# Altium PCB ECE315.PcbDoc
Units mil, origin at the board's own origin, x right, y up, seen from the top; angles counter-clockwise.
Board outline 1968.5 x 1968.5 mil, 2 copper layers (Top Layer, Bottom Layer); 21 components, 23 nets, 126 pads, 30 vias.
Unrouted connection lines stored in the file: 41.
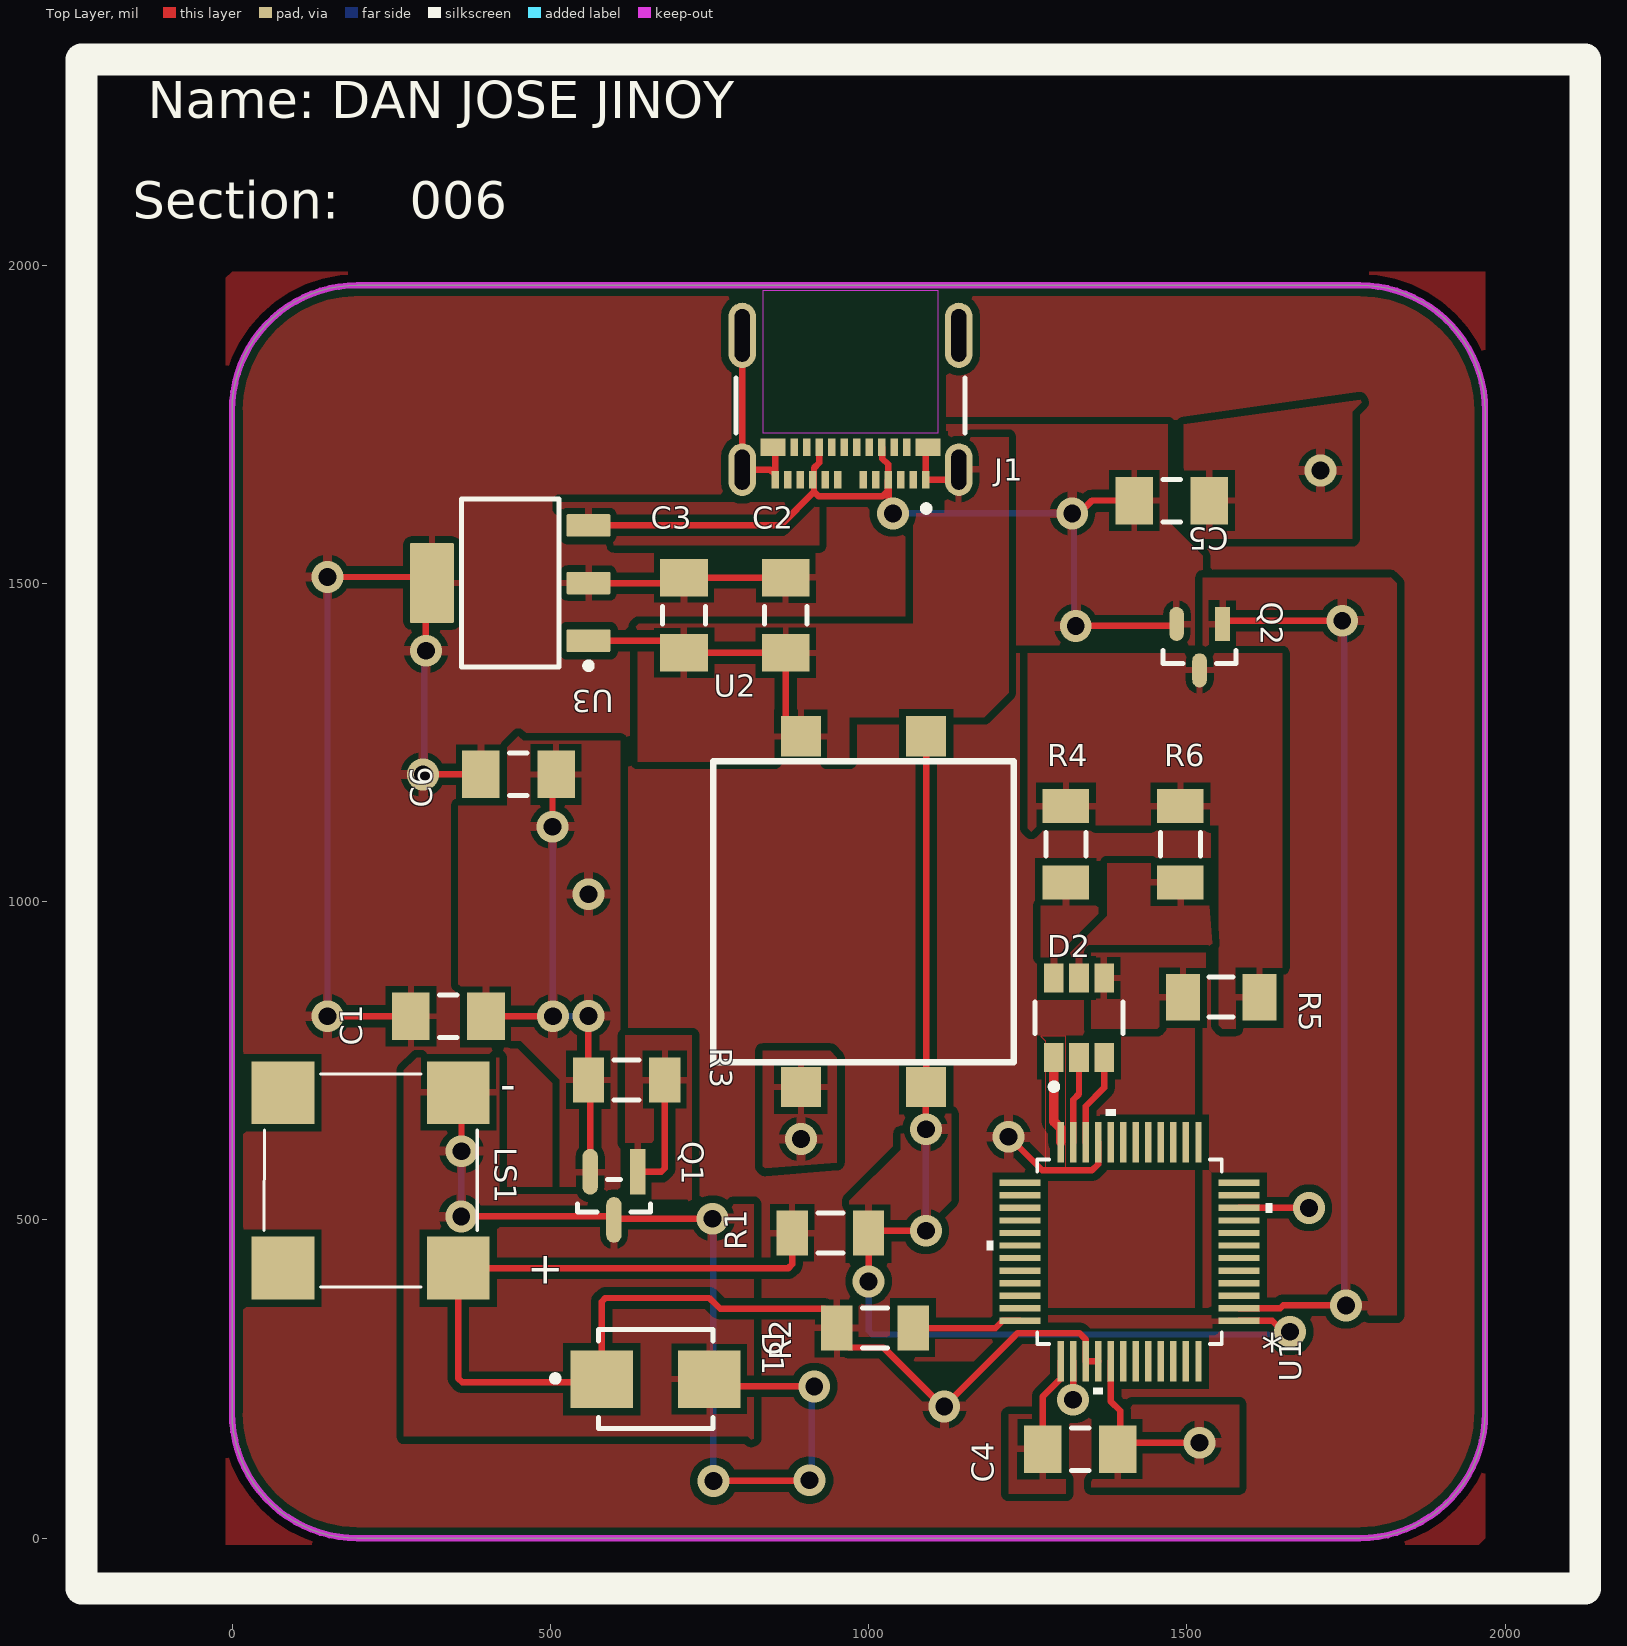
[diagram p0: Top Layer view]
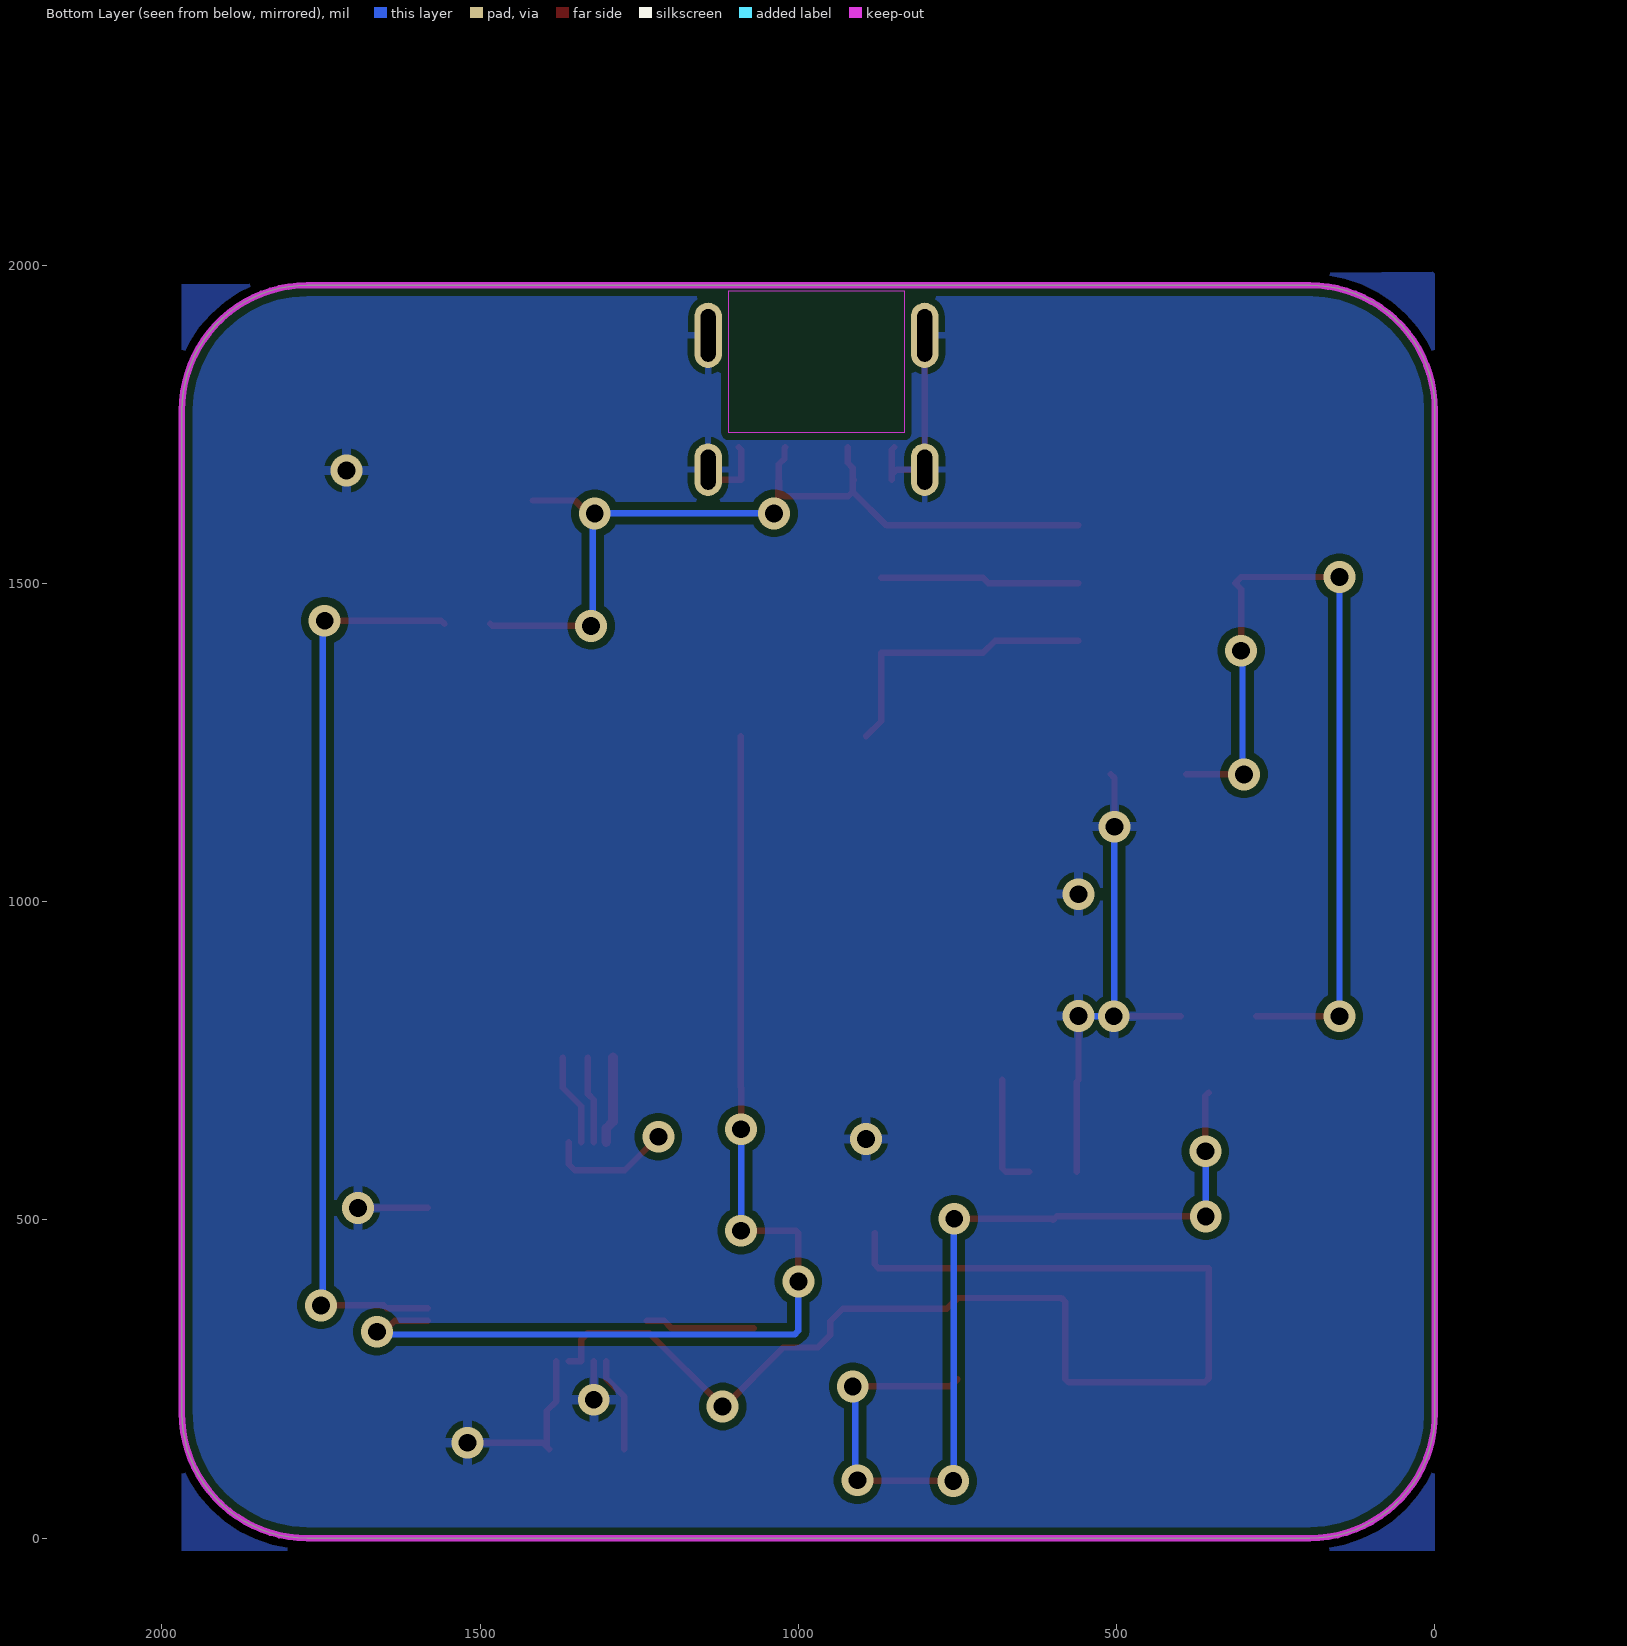
[diagram p1: Bottom Layer view, seen from below]
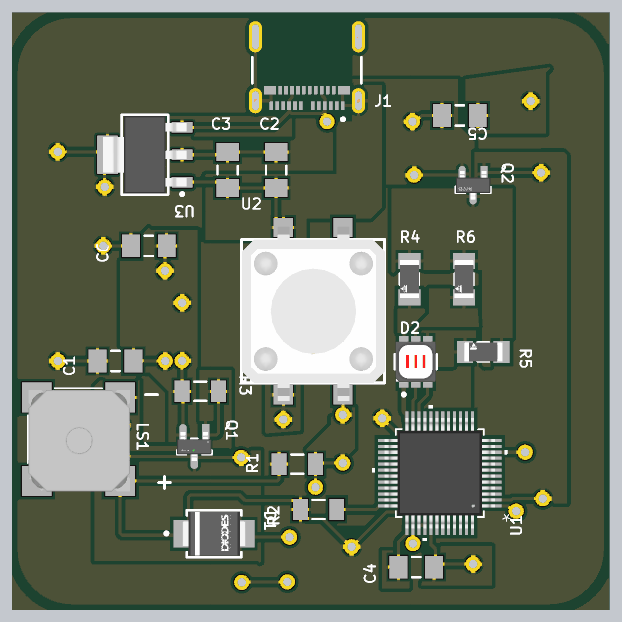
[diagram p2: 3D render of the assembled board from above, using the file's embedded part models]

## Layer stack, top to bottom
Top Solder: solder mask 0.4, Solder Resist, Dk 3.5
Top Layer: signal copper 1.4
Dielectric1: dielectric 12.6, FR-4, Dk 4.8
Bottom Layer: signal copper 1.4
Bottom Solder: solder mask 0.4, Solder Resist, Dk 3.5

## Board outline
0,196.85 ccw(c196.85,196.85) 196.85,0 1771.65,0 ccw(c1771.65,196.85) 1968.5,196.85 1968.5,1771.65 ccw(c1771.65,1771.65) 1771.65,1968.5 196.85,1968.5 ccw(c196.85,1771.65) 0,1771.65

## Design rules (kind name [scope] priority, off if disabled: settings)
Clearance Polygon_Clearance [All vs InPolygon] p1: gap=12 ignorepadtopadclearanceinfootprint=FALSE except(0: Arc-Hole Track-Hole SMDPad-Hole THPad-Hole Via-Hole Fill-Hole Poly-Hole Region-Hole Text-Hole)
Clearance [All] p2: gap=7 ignorepadtopadclearanceinfootprint=TRUE
ComponentClearance [InComponent('U3')] p1: gap=0 collisioncheckmode=3 verticalgap=10 showdistances=FALSE
Height [All] p1: minheight=0 maxheight=866.14 prefheight=500
HoleSize [All] p1: absolutevalues=TRUE maxlimit=250 minlimit=0 maxpercent=80.000 minpercent=20.000
MinimumAnnularRing [All] p1: minimumring=6
MinimumSolderMaskSliver [All] p1: minsoldermaskwidth=0
NetAntennae NetAntennae_5.0V [InNet('5.0V')] p1: netantennaetolerance=0
NetAntennae NetAntennae_3.3V [InNet('3.3V')] p2: netantennaetolerance=0
PolygonConnect [IsNamedPolygon('5.0V_L01_P019') or IsNamedPolygon('3.3V_L01_P020') vs IsVia] p1: connectstyle=Relief reliefconductorwidth=10 reliefentries=4 polygonreliefangle="90 Angle" airgapwidth=10
PolygonConnect PolygonConnect_2 [All vs IsVia] p2: connectstyle=Relief reliefconductorwidth=15 reliefentries=4 polygonreliefangle="90 Angle" airgapwidth=10
PolygonConnect PolygonConnect_1 [All] p3: connectstyle=Relief reliefconductorwidth=10 reliefentries=4 polygonreliefangle="90 Angle" airgapwidth=10
RoutingVias [All] p1: holewidth=28 width=50 viastyle="Through Hole" minholewidth=15 minwidth=25 maxholewidth=28 maxwidth=50
SilkToSilkClearance [All] p1: silktosilkclearance=0
SilkToSolderMaskClearance [IsPad] p1: minsilkscreentomaskgap=0 clearancetoexposedcopper=TRUE
SolderMaskExpansion [All] p1: expansion=4 istentingtop=FALSE
Width [All] p1: maxlimit=150 minlimit=7 preferedwidth=15
23 further rules are at their usual default settings.

## Components (designator, comment, footprint, x,y, rotation, side; value= is the part's Value field where it differs from the comment)
C1 "C1206C105K3RACTU" CAPC3216X180X50ML20T25 340,820 r180 top
C2 "C1206C105K3RACTU" CAPC3216X180X50ML20T25 870,1450 r90 top
C3 "C1206C105K3RACTU" CAPC3216X180X50ML20T25 710,1450 r90 top
C4 "C1206C105K3RACTU" CAPC3216X180X50ML20T25 1332.52,140 r180 top
C5 "C1206C105K3RACTU" CAPC3216X180X50ML20T25 1476.38,1630.18 r180 top
C6 "C1206C105K3RACTU" CAPC3216X180X50ML20T25 450,1200 r180 top
D1 "B340LB-13-F" FP-SMB-MFG 665.35,250 r0 top value=180pF
D2 "CLX6F-FKC-CKNNQDGBB7A363" FP-CLX6F-FKC-CKNNQDGBB7A3-IPC_C 1330.63,817.6 r90 top
J1 "1054500101" FP-1054500101-MFG 971.65,1811.02 r180 top locked
LS1 "CMT-8540S-SMT" CUI_CMT-8540S-SMT 217.8,562.2 r0 top
Q1 "2N7002ET1G" FP-318-08-IPC_A 600,537.8 r270 top
Q2 "DMP3099L-7" FP-SOT23-IPC_B 1520,1400 r270 top
R1 "RC1206FR-0710KL" RESC3116X65X40ML10T20 940,479.53 r180 top
R2 "RC1206FR-0710KL" RESC3116X65X40ML10T20 1010.04,330 r180 top
R3 "RC1206FR-0710KL" RESC3116X65X40ML10T20 619.96,720 r0 top
R4 "CRCW1206330RFKEA" FP-CRCW1206-e3-IPC_A 1310,1090.08 r270 top
R5 "CRCW1206330RFKEA" FP-CRCW1206-e3-IPC_A 1553.73,850 r180 top
R6 "CRCW1206330RFKEA" FP-CRCW1206-e3-IPC_A 1490,1090.08 r270 top
U1 "CY8C4045AZI-S413" TQFP48_7X7X1P4_CYP-M 1410,450 r180 top
U2 "TL3300DF160Q" TL3300DF160Q 992.13,984.25 r90 top locked
U3 "TLV1117LV33DCYR" DCY0004A_N 436.97,1500.55 r180 top

## Footprints (in the part's own frame and the unit in brackets; to place one, negate y for a bottom-side part, rotate by r counter-clockwise, add the part's x,y. Pads: shape width x height; smd on the part's side, far side on the other; paste and mask are expansions set on the pad)
CAPC3216X180X50ML20T25 [mm] "Chip Capacitor, 2-Leads, Body 3.40x1.80mm, IPC Low Density"
  rect 1.5x1.9 smd: 1(-1.5,0) 2(1.5,0)
  silkscreen extent -0.35,-0.85 0.35,0.85, body extent -1.7,-0.9 1.7,0.9, height 1.8
CUI_CMT-8540S-SMT [mm]
  rect 2.5x2.5 smd: 1(-3.5,3.5) 2(-3.5,-3.5) N(3.5,3.5) P(3.5,-3.5)
  silkscreen extent -4.25,-4.25 4.25,4.25, body extent -4.18,-4.38 4.32,4.12, height 4.05
DCY0004A_N [mm] "SOT223, 4-Leads, Body 6.7x3.7mm, Pitch 2.3mm, IPC Medium Density"
  rrect11% 1.75x0.9 smd: 1(-3.125,2.3) 2(-3.125,0) 3(-3.125,-2.3)
  rrect6% 1.75x3.2 smd: 4(3.125,0)
  silkscreen extent -3.25,-3.35 1.95,3.42, body extent -3.5,-3.25 3.5,3.25, height 1.62
FP-318-08-IPC_A [mm]
  rect 1.824x0.618 smd paste+0 mask+0: 1(-0.96,0.95)
  rrect100% 1.824x0.618 smd paste+0 mask+0: 2(-0.96,-0.95) 3(0.96,0)
  silkscreen extent -0.65,-1.45 0.65,1.45, body extent -2.37,-1.95 2.37,1.95, height 0.25
FP-1054500101-MFG [mm]
  rrect100% 1.1x2.1 hole 1.6 slot 0.6 at 0 deg paste-1000 mask+0: 1(-4.32,3.36) 2(4.32,3.36)
  rrect100% 1.1x2.6 hole 2.1 slot 0.6 at 0 deg paste-1000 mask+0: 3(-4.32,-2) 4(4.32,-2)
  rect 0.3x0.7 smd paste+0 mask+0: A1(-3,3.77) A2(-2.5,3.77) A3(-2,3.77) A4(-1.5,3.77) A5(-1,3.77) A6(-0.5,3.77) A7(0.5,3.77) A8(1,3.77) A9(1.5,3.77) A10(2,3.77) A11(2.5,3.77) A12(3,3.77) B2(2.25,2.47) B3(1.75,2.47) B4(1.25,2.47) B5(0.75,2.47) B6(0.25,2.47) B7(-0.25,2.47) B8(-0.75,2.47) B9(-1.25,2.47) B10(-1.75,2.47) B11(-2.25,2.47)
  rect 1x0.7 smd paste+0 mask+0: B1(3.1,2.47) B12(-3.1,2.47)
  Keep-Out Layer region: -3.5,-3.77 3.5,-3.77 3.5,1.88 -3.5,1.88
  silkscreen extent -4.57,-0.3 4.57,5.03
FP-CLX6F-FKC-CKNNQDGBB7A3-IPC_C [mm]
  rect 1.16x0.78 smd paste+0 mask+0: 1(-1.585,1) 2(-1.585,0) 3(-1.585,-1) 4(1.585,-1) 5(1.585,0) 6(1.585,1)
  silkscreen extent -2.87,-1.75 0.63,1.75, body extent -2.26,-1.85 2.26,1.85, height 0.25
FP-CRCW1206-e3-IPC_A [mil]
  rect 53.39x73.16 smd paste+0 mask+0: 1(-60.08,0) 2(60.08,0)
  silkscreen extent -19,-31 19,31, body extent -106,-56 106,56, height 10
FP-SMB-MFG [mm]
  rect 2.5x2.3 smd paste+0 mask+0: 1(-2.15,0) 2(2.15,0)
  silkscreen extent -4.12,-1.97 2.28,1.97, body extent -3.5,-2.07 3.5,2.07, height 0.25
FP-SOT23-IPC_B [mm]
  rect 1.359x0.587 smd paste+0 mask+0: 1(-0.927,0.915)
  rrect100% 1.359x0.587 smd paste+0 mask+0: 2(-0.927,-0.915) 3(0.927,0)
  silkscreen extent 0.13,-1.45 0.65,1.45, body extent -1.86,-1.7 1.86,1.7, height 0.25
RESC3116X65X40ML10T20 [mm] "Chip Resistor, 2-Leads, Body 3.10x1.60mm, IPC Low Density"
  rect 1.25x1.8 smd: 1(-1.525,0) 2(1.525,0)
  silkscreen extent -0.5,-0.8 0.5,0.8, body extent -1.6,-0.85 1.6,0.85, height 0.65
TL3300DF160Q [mm] "SWITCH TACTILE SPST-NO 0.05A 12V"
  rect 1.6x1.6 smd: 1(-7,2.5) 2(7,2.5) 3(-7,-2.5) 4(7,-2.5)
  silkscreen extent -6,-6 6,6, body extent -7.51,-6.03 7.49,5.97, height 4.3
TQFP48_7X7X1P4_CYP-M [mil]
  rect 64x10 smd paste+0 mask+0: 1(-172,108.27) 2(-172,88.58) 3(-172,68.9) 4(-172,49.21) 5(-172,29.53) 6(-172,9.84) 7(-172,-9.84) 8(-172,-29.53) 9(-172,-49.21) 10(-172,-68.9) 11(-172,-88.58) 12(-172,-108.27) 25(172,-108.27) 26(172,-88.58) 27(172,-68.9) 28(172,-49.21) 29(172,-29.53) 30(172,-9.84) 31(172,9.84) 32(172,29.53) 33(172,49.21) 34(172,68.9) 35(172,88.58) 36(172,108.27)
  rect 10x64 smd paste+0 mask+0: 13(-108.27,-172) 14(-88.58,-172) 15(-68.9,-172) 16(-49.21,-172) 17(-29.53,-172) 18(-9.84,-172) 19(9.84,-172) 20(29.53,-172) 21(49.21,-172) 22(68.9,-172) 23(88.58,-172) 24(108.27,-172) 37(108.27,172) 38(88.58,172) 39(68.9,172) 40(49.21,172) 41(29.53,172) 42(9.84,172) 43(-9.84,172) 44(-29.53,172) 45(-49.21,172) 46(-68.9,172) 47(-88.58,172) 48(-108.27,172)
  silkscreen extent -224,-224 224,224, body extent -182,-182 182,182, height 63

## Part data
C1 C2 C3 C4 C5 C6: library part CMP-2000-04991-1, "Chip Capacitor, 1 uF, +/- 10%, 25 V, -55 to 125 degC, 1206 (3216 Metric), RoHS, Tape and Reel", Capacitance=1uF, Capacitance - nF=1000nF, Case Code (Imperial)=1206, Case Code (Metric)=3216, Case Height=1.6mm, Case Length=3.2mm, Dielectric=X7R, Manufacturer=Kemet, Max Operating Temperature=125°C, Maximum Operating Temperature=+125C, Min Operating Temperature=-55°C, Minimum Operating Temperature=-55C, Operating Temperature Range=-55Cto+125C, Package / Case=1206(3216metric), Package Description="2-Pin Surface Mount Device, Body 3.2 x 1.6 mm", Package Quantity=1, Supplier Part Number 1=399-C1206C105K3RAC7800CT-ND, Temperature Coefficient / Code=+/-15%, Tolerance=10%, Voltage=25V, Brand=Kemet, Case Code - in=1206, Case Code - mm=3216, Case Width=1.6mm, Case/Package=1206, Category="Ceramic Capacitors", Class=Class1, Construction=Flat, Datasheet URL=https://ciiva.com/datasheet-click-18194173?src=ciiva&sig=6daff8c4, Datasheet Version=Jul-14, Depth=1.6mm, Dimensions=1.6mmWx3.2mmLx1.6mmH, Factory Pack Quantity=2000, Height=1.6mm, Length=3.2mm, Manufacturer Part Number=C1206C105K3RACTU, Manufacturer URL=http://www.kemet.com/, Mount="Surface Mount", Package Reference=1206, Packaging=Reel, Pricing 1="1=0.24000, 10=0.16700, 50=0.10000, 100=0.08440, 500=0.05778, 1000=0.05111 (USD)", Product=GeneralTypeMLCCs, Product Category=MultilayerCeramicCapacitorsMLCC-SMD/SMT, Radiation Hardening=No, Reach SVHC Compliant=No, RoHS=Details, RoHS Compliant=Yes, Series=C1206C, Stock 1=908349, Supplier 1=Digi-Key, Termination=SMD/SMT, Termination Style=SMD/SMT, Thickness=0.055inch, Type=SMDMLCCX7R6.3-250VDCCommericalGrade, Voltage Rating=25V, Voltage Rating (DC)=25V, Voltage Rating DC=25V, Width=0.063inch
D1: library part CMP-12790-000022-1, "DIODE SCHOTTKY 40V 3A SMB", Average Rectified Current=3A, Capacitance=180pF, Case/Package=SMB, Forward Voltage=450mV, Manufacturer="Diodes Inc.", Max Forward Surge Current (Ifsm)=70A, Max Junction Temp=+150°C, Max Operating Temperature=125°C, Max Repetitive Reverse Voltage=40V, Max Reverse Current=2mA, Min Operating Temperature=-55°C, Package Quantity=3000, Supplier Part Number 1=B340LB-FDICT-ND, Temperature="-55°C to +150°C", Automotive=No, Category=Diode, ComponentLink1Description=https://datasheet.ciiva.com/4715/ds30240-71143-4715794.pdf?src-supplier=Mouser, ComponentLink1URL=https://datasheet.ciiva.com/4715/ds30240-71143-4715794.pdf?src-supplier=Mouser, ComponentLink2Description=Datasheet, ComponentLink2URL=https://www.diodes.com/assets/Datasheets/ds30240.pdf, ComponentLink3Description=https://datasheet.ciiva.com/26949/getdatasheetpartid-146318-26949355.pdf?src-supplier=Verical, ComponentLink3URL=https://datasheet.ciiva.com/26949/getdatasheetpartid-146318-26949355.pdf?src-supplier=Verical, ComponentLink4Description=https://datasheet.ciiva.com/1177/ds30240-1177479.pdf?src-supplier=Element14, ComponentLink4URL=https://datasheet.ciiva.com/1177/ds30240-1177479.pdf?src-supplier=Element14, ComponentLink5Description=https://datasheet.ciiva.com/16380/ds30240-16380877.pdf?src-supplier=Future+Electronics, ComponentLink5URL=https://datasheet.ciiva.com/16380/ds30240-16380877.pdf?src-supplier=Future+Electronics, ComponentLink6Description=https://datasheet.ciiva.com/8303/ds30240-8303077.pdf?src-supplier=Avnet, ComponentLink6URL=https://datasheet.ciiva.com/8303/ds30240-8303077.pdf?src-supplier=Avnet, ComponentLink7Description=https://datasheet.ciiva.com/914/ds30240-914107.pdf?src-supplier=Digi-Key, ComponentLink7URL=https://datasheet.ciiva.com/914/ds30240-914107.pdf?src-supplier=Digi-Key, ComponentLink8Description=https://datasheet.ciiva.com/914/ds30240-914108.pdf?src-supplier=Digi-Key, ComponentLink8URL=https://datasheet.ciiva.com/914/ds30240-914108.pdf?src-supplier=Digi-Key, ComponentLink9Description=https://datasheet.ciiva.com/914/ds30240-914106.pdf?src-supplier=Digi-Key, ComponentLink9URL=https://datasheet.ciiva.com/914/ds30240-914106.pdf?src-supplier=Digi-Key, Current=3A, Current Rating=3A, Device Class L1="Discrete Semiconductors", Device Class L2=Diodes, Device Class L3="Schottky Diodes", Digikey Description="DIODE SCHOTTKY 40V 3A SMB", Element Configuration=Single, Footprint Url=https://www.diodes.com/assets/Package-Files/SMB.pdf, Forward Current=3A, Height=2.5mm, Lead Free=Yes, Length=4.57mm, Manufacturer Part Number=B340LB-13-F, Max Repetitive Reverse Voltage (Vrrm)=40V, Max Reverse Voltage (DC)=40V, Max Surge Forward Current=70A, Mount="Surface Mount", Mouser Description="Schottky Diodes & Rectifiers 40V 3A", Number of Pins=2, Octopart=https://octopart.com/b340lb-13-f-diodes+inc.-325823, Output Current=3A, Package=SMB, Packaging="Tape and Reel", Peak Non-Repetitive Surge Current=70A, Peak Reverse Current=2mA, Polarity=Standard, Pricing 1="1=0.43000, 10=0.36500, 100=0.27250, 500=0.21414, 1000=0.16547 (USD)", Radiation Hardening=No, Reach SVHC Compliant=Yes, Reverse Voltage=40V, RoHS=TRUE, RoHS Compliant=Yes, Series=-, Standoff Height=0.05mm, Stock 1=168517, Supplier 1=Digi-Key, Supplier 2=Newark, Supplier Part Number 2=12T1468, Temperature Range High=+150°C, Temperature Range Low=-55°C, Termination=SMD/SMT, Voltage=40V, Voltage Rating (DC)=40V, Weight=0.00328oz, Width=3.94mm
D2: library part CMP-240906-000003-1, "LED RGB 6PLCC SMD", Case Code (Imperial)=1206, Case Code (Metric)=3216, Case/Package=SMD/SMT, Color=Blue, Forward Voltage=3V, Manufacturer 1=Cree, Max Operating Temperature=155°C, Max Power Dissipation=400mW, Min Operating Temperature=-55°C, Resistance=49.9R, Resistor Type="Thin Film", Supplier Part Number 1=CLX6F-FKC-CKNNQDGBB7A363CT-ND, Temperature Coefficient=25ppm/°C, Test Current=10mA, Tolerance=0.1%, Category=Uncategorized, ComponentLink1Description=http://www.farnell.com/datasheets/2813756.pdf?src-supplier=Farnell, ComponentLink1URL=http://www.farnell.com/datasheets/2813756.pdf?src-supplier=Farnell, ComponentLink2Description=http://www.mouser.com/ds/2/90/CLX6F-FKC-1352-1064258.pdf?src-supplier=Mouser, ComponentLink2URL=http://www.mouser.com/ds/2/90/CLX6F-FKC-1352-1064258.pdf?src-supplier=Mouser, ComponentLink3Description=https://www.cree.com/led-components/media/documents/CLX6F-FKC-1352.pdf?src-supplier=Digi-Key, ComponentLink3URL=https://www.cree.com/led-components/media/documents/CLX6F-FKC-1352.pdf?src-supplier=Digi-Key, ComponentLink4Description=http://www.farnell.com/datasheets/2813756.pdf?src-supplier=Element14, ComponentLink4URL=http://www.farnell.com/datasheets/2813756.pdf?src-supplier=Element14, ComponentLink5Description=http://www.farnell.com/datasheets/2813756.pdf?src-supplier=Newark, ComponentLink5URL=http://www.farnell.com/datasheets/2813756.pdf?src-supplier=Newark, Dominant Wavelength=470nm, Features="Moisture Resistant", Height=2.9mm, Length=3.4mm, Lens Style=Flat, Luminous Intensity=240mcd, Manufacturer Part Number 1=CLX6F-FKC-CKNNQDGBB7A363, Mount="Surface Mount", Number of Terminations=2, Packaging="Cut Tape", Pricing 1="1=0.36000, 10=0.33500, 100=0.30960, 1000=0.27700 (USD)", RoHS=Yes, RoHS Compliant=Yes, Stock 1=28879, Supplier 1=Digi-Key, Width=3.4mm
J1: library part CMP-04767-000004-1, "CONN RCP USB3.1 TYPEC 24P SMD RA", Case/Package=0101, Current Rating=0.25/1.25/5A, Flammability Rating="UL94 V-0", Insulation Color=Black, Manufacturer=Molex, Max Operating Temperature=85°C, Min Operating Temperature=-30°C, Package=0, Supplier Part Number 1=WM12856CT-ND, Temperature="-30°C to +85°C", Temperature Range High=+85°C, Voltage Rating=30V, Automotive=No, Category=Conn, ComponentLink1Description=http://www.farnell.com/datasheets/2801634.pdf?src-supplier=Farnell, ComponentLink1URL=http://www.farnell.com/datasheets/2801634.pdf?src-supplier=Farnell, ComponentLink2Description=Datasheet, ComponentLink2URL=https://www.molex.com/webdocs/datasheets/pdf/en-us/1054500101_IO_CONNECTORS.pdf, ComponentLink3Description=http://www.literature.molex.com/SQLImages/kelmscott/Molex/PDF_Images/987651-4081.PDF?src-supplier=Avnet, ComponentLink3URL=http://www.literature.molex.com/SQLImages/kelmscott/Molex/PDF_Images/987651-4081.PDF?src-supplier=Avnet, ComponentLink4Description=http://www.farnell.com/datasheets/2672741.pdf?src-supplier=Newark, ComponentLink4URL=http://www.farnell.com/datasheets/2672741.pdf?src-supplier=Newark, ComponentLink5Description=http://www.farnell.com/datasheets/2801634.pdf?src-supplier=Newark, ComponentLink5URL=http://www.farnell.com/datasheets/2801634.pdf?src-supplier=Newark, ComponentLink6Description=https://www.molex.com/pdm_docs/ps/PS-105448-001.pdf?src-supplier=Digi-Key, ComponentLink6URL=https://www.molex.com/pdm_docs/ps/PS-105448-001.pdf?src-supplier=Digi-Key, ComponentLink7Description=https://www.molex.com/pdm_docs/sd/1054500101_sd.pdf?src-supplier=Digi-Key, ComponentLink7URL=https://www.molex.com/pdm_docs/sd/1054500101_sd.pdf?src-supplier=Digi-Key, ComponentLink8Description=http://www.farnell.com/datasheets/2801634.pdf?src-supplier=Element14, ComponentLink8URL=http://www.farnell.com/datasheets/2801634.pdf?src-supplier=Element14, ComponentLink9Description=http://www.farnell.com/datasheets/2015275.pdf?src-supplier=Element14, ComponentLink9URL=http://www.farnell.com/datasheets/2015275.pdf?src-supplier=Element14, Conn Orientation="Right Angle", Connector Type=USB, Contact Material=Gold,Nickel, Contact Plating=Gold, Device Class L1=Connectors, Device Class L2="USB Connectors", Device Class L3=unset, Digikey Description="CONN RCP USB3.1 TYPEC 24P SMD RA", Features=Shielded, Footprint Url=https://www.molex.com/pdm_docs/sd/1054500101_sd.pdf, Gender=Receptacle, Height=3.44mm, Housing Material=Thermoplastic, Is Female=yes, Lead Free=Yes, Length=8.94mm, Manufacturer Part Number=1054500101, Mating Cycles=10000, Mount="Surface Mount,Horizontal,Through Hole", Mouser Description="USB Shielded I/O Receptacle; Type C; Right Angle; Surface Mount; Gold over Nickel", Number of Contacts=24, Number of Pins=24, Number of Ports=1, Number of Terminals/Pins=24, Octopart=https://octopart.com/105450-0101-molex-68082325, Orientation="Right Angle", Packaging="Tape and Reel", Pitch=0.5mm, Pricing 1="1=2.68000, 10=2.28300, 100=1.88600 (USD)", RoHS=TRUE, RoHS Compliant=Yes, Series=-, Shielding=true, Stock 1=32236, Supplier 1=Digi-Key, Supplier 2=Newark, Supplier Part Number 2=33AC7773, Temperature Range Low=-30°C, Termination=Solder, Usb Standard="USB 3.1"
LS1: "AUDIO MAGNETIC XDCR 1-6V SMD", Frequency=4kHz, Manufacturer 1=CUI, Manufacturer Part Number 1=CMT-8540S-SMT-TR, Max Operating Temperature=70°C, Min Operating Temperature=-20°C, Operating Supply Current=150mA, Package="CUI Inc.", Supplier Part Number 1=102-3746-1-ND, Voltage Rating=5V, Availability=Unavailable, Category="Audio Products", ComponentLink1Description=https://www.cui.com/product/resource/digikeypdf/cmt-8540s-smt.pdf?src-supplier=Digi-Key, ComponentLink1URL=https://www.cui.com/product/resource/digikeypdf/cmt-8540s-smt.pdf?src-supplier=Digi-Key, CUI_purchase_URL=https://www.cuidevices.com/product/audio/buzzers/audio-transducers/cmt-8540s-smt-tr?utm_source=snapeda.com&utm_medium=referral&utm_campaign=snapedaBOM, Lead Free="Lead Free", MF="CUI Devices", MP=CMT-8540S-SMT-TR, Price=None, Pricing 1="1=3.23000, 10=2.67000, 25=2.46400, 50=2.31400, 100=2.16990, 500=1.91520 (USD)", RoHS=Yes, Sensing Method=Magnetic, SnapEDA_Link=https://www.snapeda.com/parts/CMT-8540S-SMT-TR/CUI%20Devices/view-part/587791/?ref=snap, Stock 1=66147, Supplier 1=Digi-Key
Q1: library part CMP-1058-00769-2, "MOSFET N-CH 60V 260MA SOT-23", Case/Package=SOT-23-3, Continuous Drain Current (ID)=260mA, Drain to Source Breakdown Voltage=60V, Drain to Source Resistance=2.5R, Gate to Source Voltage (Vgs)=20V, Input Capacitance=26.7pF, Max Operating Temperature=150°C, Max Power Dissipation=300mW, Min Operating Temperature=-55°C, Package Quantity=3000, Threshold Voltage=1V, Element Configuration=Single, Fall Time=1.2ns, Halogen Free="Halogen Free", Height=0.94mm, Lead Free="Lead Free", Length=2.9mm, Nominal Vgs=1V, Number of Elements=1, Number of Pins=3, On-State Resistance=2.5R, Packaging="Tape and Reel", Power Dissipation=300mW, Radiation Hardening=No, Rds On Max=2.5R, REACH SVHC="No SVHC", Rise Time=1.2ns, Turn-Off Delay Time=4.8ns, Turn-On Delay Time=1.7ns, Width=1.3mm
Q2: library part CMP-12801-000062-2, "MOSFET P-CH 30V SOT23", Case/Package=SOT-23, Continuous Drain Current (ID)=3.8A, Drain to Source Resistance=65mR, Drain to Source Voltage (Vdss)=-30V, Gate to Source Voltage (Vgs)=20V, Input Capacitance=563pF, Manufacturer=Diodes, Max Operating Temperature=150°C, Max Power Dissipation=1.08W, Min Operating Temperature=-55°C, Package Quantity=3000, Supplier Part Number 1=DMP3099L-7DICT-ND, Threshold Voltage=-2.1V, Category=MOSFETs, ComponentLink1Description=http://www.farnell.com/datasheets/2040103.pdf?src-supplier=Farnell, ComponentLink1URL=http://www.farnell.com/datasheets/2040103.pdf?src-supplier=Farnell, ComponentLink2Description=http://www.mouser.com/ds/2/115/DMP3099L-266220.pdf?src-supplier=Mouser, ComponentLink2URL=http://www.mouser.com/ds/2/115/DMP3099L-266220.pdf?src-supplier=Mouser, ComponentLink3Description=http://www.alliedelec.com/m/d/a7453f83181edfde31570147b9d1ef2f.pdf?src-supplier=Allied+Electronics, ComponentLink3URL=http://www.alliedelec.com/m/d/a7453f83181edfde31570147b9d1ef2f.pdf?src-supplier=Allied+Electronics, ComponentLink4Description=http://www.farnell.com/datasheets/2040103.pdf?src-supplier=Element14, ComponentLink4URL=http://www.farnell.com/datasheets/2040103.pdf?src-supplier=Element14, ComponentLink5Description=http://www.farnell.com/datasheets/2040103.pdf?src-supplier=Newark, ComponentLink5URL=http://www.farnell.com/datasheets/2040103.pdf?src-supplier=Newark, ComponentLink6Description=http://www.diodes.com/datasheets/DMP3099L.pdf?src-supplier=Avnet, ComponentLink6URL=http://www.diodes.com/datasheets/DMP3099L.pdf?src-supplier=Avnet, ComponentLink7Description=http://www.diodes.com/datasheets/DMP3099L.pdf?src-supplier=Digi-Key, ComponentLink7URL=http://www.diodes.com/datasheets/DMP3099L.pdf?src-supplier=Digi-Key, ComponentLink8Description=https://www.diodes.com/assets/Datasheets/DMP3099L.pdf?src-supplier=Digi-Key, ComponentLink8URL=https://www.diodes.com/assets/Datasheets/DMP3099L.pdf?src-supplier=Digi-Key, Contact Plating=Tin, Element Configuration=Single, Fall Time=15ns, Height=1.1mm, Lead Free="Lead Free", Length=3mm, Manufacturer Part Number=DMP3099L-7, Mount="Surface Mount", Number of Channels=1, Number of Pins=3, Packaging="Tape and Reel", Polarity=P-CHANNEL, Pricing 1="1=0.36000, 10=0.26500, 100=0.14980, 500=0.09922, 1000=0.07607 (USD)", Radiation Hardening=No, Rds On Max=65mR, REACH SVHC="No SVHC", Reach SVHC Compliant=Yes, Rise Time=5ns, RoHS=Yes, RoHS Compliant=Yes, Series=-, Stock 1=461842, Supplier 1=Digi-Key, Supplier 2=Newark, Supplier Part Number 2=82Y6589, Turn-Off Delay Time=31ns, Turn-On Delay Time=4.8ns, Weight=0.000282oz, Width=1.4mm
R1 R2 R3: library part CMP-1014-00623-2, "Chip Resistor, 10 KOhm, +/- 1%, 0.25 W, -55 to 155 degC, 1206 (3216 Metric), RoHS, Tape and Reel", Case Code (Imperial)=1206, Case Code (Metric)=3216, Manufacturer=Yageo, Max Operating Temperature=155degC, Max Power Dissipation=250mW, Min Operating Temperature=-55degC, Package Description="2-Pin Surface Mount Device, Body 3.1 x 1.6 mm", Package Quantity=5000, Package Reference=1206.0, Resistance=10K, Resistance Tolerance=1%, Resistor Type="Thick Film", Supplier Part Number 1=311-10.0KFRCT-ND, Temperature Coefficient=100ppm/degreesC, Voltage Rating=200V, Case/Package=1206, Category="Chip SMD Resistors", ComponentLink1Description=https://datasheet.ciiva.com/46445/444357-46445703.pdf?src-supplier=Element14, ComponentLink1URL=https://datasheet.ciiva.com/46445/444357-46445703.pdf?src-supplier=Element14, ComponentLink2Description=https://datasheet.ciiva.com/7857/1692832-7857244.pdf?src-supplier=Element14, ComponentLink2URL=https://datasheet.ciiva.com/7857/1692832-7857244.pdf?src-supplier=Element14, ComponentLink3Description=https://datasheet.ciiva.com/7857/1692832-7857245.pdf?src-supplier=Element14, ComponentLink3URL=https://datasheet.ciiva.com/7857/1692832-7857245.pdf?src-supplier=Element14, Composition=ThickFilm, Construction=Rectangular, Datasheet URL=http://www.yageo.com/NewPortal/yageodocoutput?fileName=/pdf/R-Chip/PYu-RC_Group_51_RoHS_L_5.pdf, Datasheet Version="Rev. 5, 10/2016", Depth=1.6mm, Features="Moisture Resistant", Height=0.55mm, Lead Free=LeadFree, Length=3.1mm, Manufacturer Part Number=RC1206FR-0710KL, Manufacturer URL=http://www.yageo.com/, Military Standard=Not, Number of Terminations=2, Packaging=TapeandReel, Power Rating=250mW, Pricing 1="1=0.10000, 10=0.03700, 100=0.02040, 1000=0.01236, 2500=0.01036 (USD)", REACH SVHC=Unknown, RoHS=Yes, RoHS Compliant=Yes, RoHSCompliant=true, Series=RC, Size Code=1206, Stock 1=3827063, Supplier 1=Digi-Key, Supplier 2=Newark, Supplier Part Number 2=98K7621, Termination=SMD/SMT, Tolerance=1%, Width=1.6mm
R4 R5 R6: library part CMP-2003-02098-2, "RES Thick Film, 330Ω, 1%, 0.25W, 100ppm/°C, 1206", Case Code (Imperial)=1206, Case Code (Metric)=3216, Manufacturer=Vishay, Max Operating Temperature=155°C, Max Power Dissipation=250mW, Min Operating Temperature=-55°C, Package Quantity=10, Resistance=330R, Resistance Tolerance=1%, Resistor Type="Thick Film", Supplier Part Number 1=53K2302, Temperature Coefficient=100ppm/°C, Voltage Rating=200V, Case/Package=1206, Category="Chip SMD Resistors", ComponentLink1Description=https://datasheet.ciiva.com/3882/41397335s9853079n6892-3882805.pdf?src-supplier=Arrow+Electronics, ComponentLink1URL=https://datasheet.ciiva.com/3882/41397335s9853079n6892-3882805.pdf?src-supplier=Arrow+Electronics, ComponentLink2Description=https://datasheet.ciiva.com/11811/0900766b80d98b5e-11811057.pdf?src-supplier=Rs, ComponentLink2URL=https://datasheet.ciiva.com/11811/0900766b80d98b5e-11811057.pdf?src-supplier=Rs, ComponentLink3Description=https://datasheet.ciiva.com/8944/dcrcwe3-8944790.pdf?src-supplier=Avnet, ComponentLink3URL=https://datasheet.ciiva.com/8944/dcrcwe3-8944790.pdf?src-supplier=Avnet, ComponentLink4Description=https://datasheet.ciiva.com/8944/dcrcwe3-8944796.pdf?src-supplier=Avnet, ComponentLink4URL=https://datasheet.ciiva.com/8944/dcrcwe3-8944796.pdf?src-supplier=Avnet, ComponentLink5Description=https://datasheet.ciiva.com/5548/dcrcwe3-109170-5548614.pdf?src-supplier=Mouser, ComponentLink5URL=https://datasheet.ciiva.com/5548/dcrcwe3-109170-5548614.pdf?src-supplier=Mouser, ComponentLink6Description=https://datasheet.ciiva.com/2468/dcrcwe3-2468856.pdf?src-supplier=Digi-Key, ComponentLink6URL=https://datasheet.ciiva.com/2468/dcrcwe3-2468856.pdf?src-supplier=Digi-Key, ComponentLink7Description=https://datasheet.ciiva.com/2468/dcrcwe3-2468857.pdf?src-supplier=Digi-Key, ComponentLink7URL=https://datasheet.ciiva.com/2468/dcrcwe3-2468857.pdf?src-supplier=Digi-Key, ComponentLink8Description=https://datasheet.ciiva.com/2468/dcrcwe3-2468858.pdf?src-supplier=Digi-Key, ComponentLink8URL=https://datasheet.ciiva.com/2468/dcrcwe3-2468858.pdf?src-supplier=Digi-Key, ComponentLink9Description=https://datasheet.ciiva.com/16766/70201119-16766716.pdf?src-supplier=Allied+Electronics, ComponentLink9URL=https://datasheet.ciiva.com/16766/70201119-16766716.pdf?src-supplier=Allied+Electronics, ComponentLink10Description=https://datasheet.ciiva.com/26317/fld-crcw-e3-data-en-26317131.pdf?src-supplier=Distrelec, ComponentLink10URL=https://datasheet.ciiva.com/26317/fld-crcw-e3-data-en-26317131.pdf?src-supplier=Distrelec, ComponentLink11Description=https://datasheet.ciiva.com/7777/1697337-7777469.pdf?src-supplier=Element14, ComponentLink11URL=https://datasheet.ciiva.com/7777/1697337-7777469.pdf?src-supplier=Element14, ComponentLink12Description=https://datasheet.ciiva.com/22869/70201119-22869980.pdf?src-supplier=Allied+Electronics, ComponentLink12URL=https://datasheet.ciiva.com/22869/70201119-22869980.pdf?src-supplier=Allied+Electronics, Composition="Thick Film", Construction=Rectangular, Contact Plating=Tin, Depth=1.6mm, Features="Automotive AEC-Q200", Height=0.55mm, Lead Free="Lead Free", Length=3.2mm, Manufacturer Part Number=CRCW1206330RFKEA, Military Standard=Not, Mount="Surface Mount", Number of Terminations=2, Packaging="Tape and Reel", Power Rating=250mW, Pricing 1="1=0.10000, 25=0.07500, 50=0.05400, 100=0.03300 (USD)", Radiation Hardening=No, RoHS=Yes, RoHS Compliant=Yes, Series=CRCW, Size Code=1206, Stock 1=4253, Supplier 1=Newark, Technology="THICK FILM", Termination=SMD/SMT, Tolerance=1%, Voltage Rating (DC)=200V, Weight=0.000353oz, Width=1.6mm
U1: "No Description Available", Mfr_Name="Cypress Semiconductor", RefDes=RefDes, Type=Type
U2: "Switch Tactile OFF (ON) SPST Round Button Gull Wing 0.05A 12VDC 1.57N SMD", Case/Package=SMD/SMT, Contact Rating @ Voltage="0.05A @ 12VDC", Current Rating=50mA, Illumination Type, Color=-, Manufacturer=E-Switch, Max Operating Temperature=70°C, Min Operating Temperature=-25°C, Operating Force=160gf, Operating Temperature="-25°C ~ 70°C", Package Quantity=1, Supplier Part Number=EG4906CT-ND, Voltage Rating (DC)=12V, Actuator Height off PCB, from Pins=4.30mm, Actuator Material=-, Actuator Orientation="Top Actuated", Actuator Type=Standard, Category=Switches, Circuit=SPST-NO, ComponentLink1Description=https://datasheet.ciiva.com/2900/n301101-2900856.pdf?src-supplier=Digi-Key, ComponentLink1URL=https://datasheet.ciiva.com/2900/n301101-2900856.pdf?src-supplier=Digi-Key, ComponentLink2Description=https://datasheet.ciiva.com/2900/n301101-2900858.pdf?src-supplier=Digi-Key, ComponentLink2URL=https://datasheet.ciiva.com/2900/n301101-2900858.pdf?src-supplier=Digi-Key, Contact Plating=Silver, Features=-, Illumination=Non-Illuminated, Illumination Type=Non-Illuminated, Illumination Voltage (Nominal)=-, Ingress Protection=-, Manufacturer 1=E-Switch, Manufacturer Part Number=TL3300DF160Q, Manufacturer Part Number 1=TL3300DF160Q, Mechanical Life="200,000 Cycles", Mount="Surface Mount", Mounting Type="Surface Mount", Outline="12.00mm x 12.00mm", Packaging="Cut Tape (CT)", Pricing 1="1=0.60000, 10=0.57800, 25=0.55680, 100=0.48180, 250=0.43896 (USD)", RoHS="RoHS Compliant", RoHS Compliant=Yes, Series=TL3300, Stock 1=57403, Supplier=Digi-Key, Supplier 1=Digi-Key, Supplier Part Number 1=EG4906CT-ND, Switch Function=Off-Mom, Switch Travel=0.35mm, Termination="Gull Wing", Termination Style="Gull Wing", Throw Configuration=SPST
U3: library part CMP-0395-00503-2, "=Section", Case/Package=SOT-223-4, Dropout Voltage=570mV, Manufacturer="Texas Instruments", Max Input Voltage=5.5V, Max Operating Temperature=125°C, Max Output Current=1A, Max Output Voltage=3.3V, Min Input Voltage=2V, Min Operating Temperature=-40°C, Operating Supply Current=50uA, Package Quantity=2500, Power Supply Rejection Ratio (PSRR)=75dB, Supplier Part Number 1=296-28778-1-ND, Accuracy=2%, Accuracy(%)=2, Category="Voltage Regulators - Linear", Code_JEDEC=TO-261, ComponentLink1Description="Manufacturer URL", ComponentLink1URL=http://www.ti.com/, ComponentLink2Description=Datasheet, ComponentLink2URL=http://www.ti.com/general/docs/lit/getliterature.tsp?genericPartNumber=TLV1117LV33&fileType=pdf, ComponentLink3Description="Package Specification", ComponentLink3URL=http://www.ti.com/litv/pdf/mpds094a, ComponentLink4Description=https://datasheet.ciiva.com/46443/1857581-46443437.pdf?src-supplier=Element14, ComponentLink4URL=https://datasheet.ciiva.com/46443/1857581-46443437.pdf?src-supplier=Element14, ComponentLink5Description=https://datasheet.ciiva.com/46443/1857581-46443438.pdf?src-supplier=Element14, ComponentLink5URL=https://datasheet.ciiva.com/46443/1857581-46443438.pdf?src-supplier=Element14, ComponentLink6Description=https://datasheet.ciiva.com/46443/1857581-46443450.pdf?src-supplier=Element14, ComponentLink6URL=https://datasheet.ciiva.com/46443/1857581-46443450.pdf?src-supplier=Element14, ComponentLink7Description=https://datasheet.ciiva.com/2060/tlv1117lv-2060227.pdf?src-supplier=Digi-Key, ComponentLink7URL=https://datasheet.ciiva.com/2060/tlv1117lv-2060227.pdf?src-supplier=Digi-Key, ComponentLink8Description=https://datasheet.ciiva.com/2060/tlv1117lv-2060226.pdf?src-supplier=Digi-Key, ComponentLink8URL=https://datasheet.ciiva.com/2060/tlv1117lv-2060226.pdf?src-supplier=Digi-Key, ComponentLink9Description=https://datasheet.ciiva.com/2060/tlv1117lv-2060228.pdf?src-supplier=Digi-Key, ComponentLink9URL=https://datasheet.ciiva.com/2060/tlv1117lv-2060228.pdf?src-supplier=Digi-Key, DatasheetVersion=SBVS160A, Eco-Plan="Green (RoHS & no Sb/Br)", Fixed Output Options(V)=3.3, Iout(Max)(A)=1, Iq(Typ)(mA)=0.05, Lead Free="Lead Free", Manufacturer Part Number=TLV1117LV33DCYR, Min Output Voltage=3.3V, Mounting Technology="Surface Mount", Number of Pins=4, Number of Regulators=1, Output Configuration=Positive, Output Current=1A, Output Type=Fixed, PackageDescription="4-Pin Plastic Small Outline, Body 3.5 x 6.5 mm, Pitch 2.3 mm", PackageReference=DCY0004A, PackageVersion=4202506/B, Packaging="Cut Tape", PartNumber=TLV1117LV33DCYR, Polarity=Positive, Pricing 1="1=0.35000, 10=0.28200, 25=0.25800, 100=0.19200, 250=0.17400, 500=0.14400, 1000=0.10800 (USD)", Quiescent Current=50uA, RoHS=Yes, RoHS Compliant=Yes, Series=-, Stock 1=3051, SubFamily="Single Channel LDO", Supplier 1=Digi-Key, Vdo(Typ)(mV)=1200, Vin(Max)(V)=5.5, Vin(Min)(V)=2, Vout Adj(Max)(V)=3.3, Vout Adj(Min)(V)=3.3, Weight=0.009171oz

## Via types
v1: diameter 50, hole 28, Top Layer to Bottom Layer, 30 vias

## Nets (pads, with @x,y where several pads share a name; then routed paths per layer and width w, separated by ;. In a path a pad name is that pad's centre, name@x,y a point inside that pad or via, vN(x,y) a via of type N, cw(c..) or ccw(c..) an arc to the next point about the centre after c; other vN are vias at no path point)
3.3V: C1.2 C2.2 C3.2 C6.2 D1.1 LS1.P R1.2 R2.2 U1.21 U1.39 U1.40 U3.2 U3.4 | length 3953.4
  Top Layer w10: v1(150,820) C1.2 ; v1(150,1510) 304.49,1510 U3.4 304.49,1491.1 v1(304.49,1394.23) ; v1(300,1200) C6.2 ; U3.2 701.5,1500.55 C3.2 C2.2 ; R1.2 880.19,479.3 880.19,430.27 874.33,424.41 LS1.P 355.59,250.86 361.45,245 575.71,245 D1.1 580.71,371.58 586.57,377.43 749.98,377.43 766.98,360.43 930.39,360.43 950,340.83 R2.2 950,319.17 969.61,299.57 1023.5,299.57 1116.11,206.96 v1(1119.05,206.96) 1234.09,322 1331.39,322 1341.1,312.29 U1.39 U1.40 ; v1(1220,630.72) 1272.72,578 1351.07,578 1360.79,587.71 U1.21
  Bottom Layer w10: v1(150,820) v1(150,1510) ; v1(300,1200) 302.24,1202.24 302.24,1391.99 v1(304.49,1394.23)
5.0V: C5.2 J1.A4 J1.A9 J1.B4 J1.B9 Q2.2 U3.3 | length 1428.4
  Top Layer w10: U3.3 861.63,1591.1 914.38,1643.85 ; J1.A9 J1.A9@914.38,1662.6 ; J1.B4 922.44,1689.41 914.38,1681.35 J1.A9@914.38,1662.6 ; J1.B9 1021.77,1712.87 1021.77,1695.9 1030.71,1686.97 J1.A4 ; v1(1038.16,1610) 1031.61,1616.54 1031.61,1661.69 J1.A4 ; v1(1320,1610) 1330.82,1610 1351,1630.18 C5.2 ; v1(1325.63,1433.24) 1480.73,1433.24 Q2.2 ; 914.38,1643.85 J1.A9@914.38,1662.6 ; 914.38,1643.85 921.41,1636.82 1021.9,1636.82 1029.8,1644.72 1029.8,1661.69 J1.A4
  Bottom Layer w10: v1(1038.16,1610) v1(1320,1610) 1322.81,1607.19 1322.81,1436.06 v1(1325.63,1433.24)
BLUE_EN: D2.1 U1.24 | length 137.5
  Top Layer w15: D2.1 1291.26,654.47 1301.73,644 U1.24
BLUE_R_1: D2.6 R4.2
BTN_IN: R1.1 U1.1 U2.3 U2.4 | length 1776.1
  Top Layer w10: v1(1000.04,403.47) R1.1 1003.42,482.9 v1(1090,482.9) ; v1(1090,642.48) 1090,708.11 U2.3 U2.4 ; U1.1 1634.18,341.73 1651.41,324.5 v1(1662.24,324.5)
  Bottom Layer w10: v1(1000.04,403.47) 1000.04,325.86 1005.9,320 1657.74,320 v1(1662.24,324.5) ; v1(1090,482.9) v1(1090,642.48)
BUZZER: Q1.1 R3.2 | length 183.7
  Top Layer w10: Q1.1 637.5,575.5 674.14,575.5 680,581.36 R3.2
BUZZER_Q: D1.2 LS1.N Q1.3 | length 1478.6
  Top Layer w10: LS1.N 360.59,695 v1(360.59,608) ; v1(360,505.62) 594.38,505.62 Q1.3 601.9,501.9 v1(755,501.9) ; D1.2 761.4,238.6 v1(914.57,238.6) ; v1(756.63,89.7) 757.37,90.43 906.47,90.43 v1(907.21,91.17)
  Bottom Layer w10: v1(360,505.62) 360.3,505.92 360.3,607.7 v1(360.59,608) ; v1(755,501.9) 755.82,501.08 755.82,90.51 v1(756.63,89.7) ; v1(907.21,91.17) 910.89,94.85 910.89,234.92 v1(914.57,238.6)
EN_D1: Q2.1 U1.2 | length 1438.1
  Top Layer w10: Q2.1 1561.02,1441.48 v1(1744.22,1441.48) ; U1.2 1646.83,361.42 1651.24,365.83 v1(1750,365.83)
  Bottom Layer w10: v1(1744.22,1441.48) 1747.11,1438.6 1747.11,368.71 v1(1750,365.83)
EN_D2: U1.3
EN_D3: U1.4
EN_D4: U1.5
GND: C1.1 C2.1 C3.1 C4.1 C5.1 C6.1 J1.1 J1.2 J1.3 J1.4 J1.A1 J1.A12 J1.B1 J1.B12 Q1.2 R3.1 U1.10 U1.38 U1.41 U2.1 U2.2 U3.1 | length 2123.1
  Top Layer w10: C1.1 v1(504.43,820) ; v1(503.39,1117.79) 503.39,1194.33 C6.1 ; v1(559.92,820.52) R3.1 562.6,717.32 Q1.2 ; U3.1 690.94,1410 C3.1 C2.1 870,1283.54 U2.2 ; J1.4 J1.2 845.28,1678.74 J1.A12@853.54,1670.47 ; J1.B1 853.54,1709.84 J1.A12@853.54,1670.47 ; J1.A12 J1.A12@853.54,1670.47 ; J1.B12 1089.76,1709.84 J1.A1 1126.35,1662.6 1141.73,1677.98 J1.1 ; v1(1321.42,217.57) U1.38 ; U1.41 1380.47,214.88 1395.35,200 C4.1@1395.35,143.78 ; C4.1 C4.1@1395.35,143.78 ; v1(1520,150) 1401.57,150 C4.1@1395.35,143.78 ; U1.10 v1(1691.84,518.9)
  Bottom Layer w10: v1(503.39,1117.79) 503.91,1117.27 503.91,820.52 v1(504.43,820) 504.69,820.26 559.66,820.26 v1(559.92,820.52)
  other v1: 893.7,627 559.92,1011.81 1710,1677.58
GREEN_EN: D2.2 U1.23 | length 137
  Top Layer w10: U1.23 1321.42,688.57 1330.63,697.79 D2.2
GREEN_R_1: D2.5 R6.2
LED_PWR_D1: Q2.3 R4.1 R5.1 R6.1
RED_EN: D2.3 U1.22 | length 145.2
  Top Layer w10: U1.22 1341.1,678.73 1370,707.63 D2.3
RED_R_1: D2.4 R5.2
UART0_RX: U1.42
UART0_TX: U1.43
UART1_RX: U1.32
UART1_TX: U1.33
VCCD: C4.2 U1.37 | length 149.7
  Top Layer w10: C4.2 1273.46,222.73 1301.73,251 U1.37
XRES_N: R2.1 U1.36 | length 172.8
  Top Layer w10: R2.1 1199.27,330 1211,341.73 U1.36
pads on no net: J1.A2 J1.A3 J1.A5 J1.A6 J1.A7 J1.A8 J1.A10 J1.A11 J1.B2 J1.B3 J1.B5 J1.B6 J1.B7 J1.B8 J1.B10 J1.B11 LS1.1 LS1.2 U1.6 U1.7 U1.8 U1.9 U1.11 U1.12 U1.13 U1.14 U1.15 U1.16 U1.17 U1.18 U1.19 U1.20 U1.25 U1.26 U1.27 U1.28 U1.29 U1.30 U1.31 U1.34 U1.35 U1.44 U1.45 U1.46 U1.47 U1.48

## Polygon pours and split planes (outlines as drawn)
3.3V on Top Layer "3.3V" (solid, pour order 39): 0,1990 -10,1980 -10,-10 1958.5,-10 1968.5,0 1968.5,1990
GND on Top Layer "BT_In" (solid, pour order 38): 1495,1750 1495,1573.27 1498.27,1570 1760,1570 1760,1770 1780,1790
5.0V on Top Layer "BT_In" (solid, pour order 37): 1011.02,1750 1011.02,1585.18 1001.18,1575.33 1173.98,1402.54 1525,1402.54 1525,1543.27 1470,1598.27 1470,1750
EN_D1 on Top Layer "BT_In" (solid, pour order 35): 1525,1509.06 1525,350 1830,350 1830,1500 1820,1510
5.0V on Top Layer "BT_In" (solid, pour order 27): 515,1560 922.44,1560 922.44,1683.74 902.76,1683.74 902.76,1639.24 891.31,1627.79 515,1627.79
GND on Top Layer "BT_In" (solid, pour order 25): 1220,1730 1220,1328.02 1181.98,1290 970,1290 970,1220 637.4,1220 637.4,1425 632.4,1430 638.89,1436.48 1070.08,1436.48 1070.08,1610 1120,1610 1120,1730
GND on Top Layer "BT_In" (solid, pour order 24): 600,538.58 610,548.58 610,1252.81 457.19,1252.81 450,1260 355.59,1165.59 355.59,781.56 453.64,781.56 515,720.2 515,540
GND on Top Layer "BT_In" (solid, pour order 23): 950,590 950,755.2 939.76,765.43 833.86,765.43 833.86,580.61
GND on Top Layer "BT_In" (solid, pour order 22): 1350,320 1350,80 1582,80 1582,210 1391.57,210 1391.57,318.7
LED_PWR_D1 on Top Layer "BT_In" (solid, pour order 20): 1650,803.42 1650,1390 1250,1390 1250,1115.63 1255.63,1110 1265.63,1120 1550,1120 1550,806.02 1556.02,800
BLUE_R_1 on Top Layer "BT_In" (solid, pour order 18): 1360.79,1060 1360.79,963.62 1310,912.83 1310,847.17 1268.46,847.17 1270.41,849.12 1270.41,1060
GREEN_R_1 on Top Layer "BT_In" (solid, pour order 17): 1530,1060 1375,1060 1375,977.83 1310,912.83 1310,847.17 1348,847.17 1350,845.17 1350,930 1540,930
RED_R_1 on Top Layer "BT_In" (solid, pour order 13): 1350,920 1350,800 1520,800 1530,790 1530,920
BLUE_EN on Top Layer "BT_In" (solid, pour order 8): 1310,580.61 1310,788.46 1270.41,788.46 1277.32,781.56 1277.32,580.61
VCCD on Top Layer "BT_In" (solid, pour order 7): 1310,70 1310,314 1291.26,314 1291.26,194.72 1220,194.72 1220,70
BUZZER on Top Layer "BT_In" (solid, pour order 6): 615.98,790 617.52,788.46 617.52,532.48 715,532.48 722.52,524.96 722.52,790
BUZZER_Q on Top Layer "BT_In" (solid, pour order 5): 290,755.2 270,735.2 270,160 810,160 820,150 820,524.96 625.04,524.96 610,540 420,540 420,755.2
XRES_N on Top Layer "BT_In" (solid, pour order 4): 1033.47,377.43 1033.47,278 1282,278 1282,350
BTN_IN on Top Layer "BT_In" (solid, pour order 3): 970,524.96 970,320 980,330 1630,330 1630,350 1040,350 1034.65,355.35 1034.65,524.96
BTN_IN on Top Layer "BT_In" (solid, pour order 1): 1130,740 1130,530.47 1020,420.47 970,420.47 970,530 1050.39,610.39 1050.39,740
GND on Bottom Layer "GND" (solid, pour order 41): 0,1990 0,-20 1968.5,-20 1968.5,1970

## Keep-outs
Keep-Out Layer:
  the board outline again, w10

## Silkscreen, mask and mechanical layers (free items; w line width, h text height)
Top Overlay:
  lines w50: -236.22,-78.74 -236.22,0 -236.22,314.96 -236.22,2322.83 2125.98,2322.83 2125.98,-78.74 -236.22,-78.74
  text "Bench Exam" at -314.96,4251.97 h200
  text "Instructions" at -354.33,4015.75 h200
  text "1. A GND Polygon will be placed on the bottom layer. This polygon should cover the entire board." at -239.12,3921.38 h100
  text "2. A 3.3V Polygon will be placed on the top layer. This polygon should cover the entire board." at -239.11,3763.9 h100
  text "3. All components MUST be on the top layer." at -237.63,3606.42 h100
  text "4. Bypass caps should be within 200 mils of a power pin." at -238.02,3448.94 h100
  text "5. All non-polygon tracks should be 10mils" at -237.56,3291.46 h100
  text "6. All nets need to be routed. (no auto-router)" at -237.51,3134.06 h100
  text "7. Add a String on the top overlay with your name." at -237.7,2976.5 h100
  text "8. Make sure there are 0 DRC errors." at -237.41,2801.36 h100
  text "9. Place parts in a way that minimizes the rat's nest." at -237.8,2661.54 h100
  text "10. Use orthogonal routing" at -237.04,2504.06 h100
  text "Name: DAN JOSE JINOY" at -132.25,2210.81 h100
  text "Section:" at -155.65,2053.33 h100
  text "006" at 279.32,2053.33 h100
Mechanical 2:
  the board outline again, w10

## Text inside footprints (layer, text, board x,y; h text height)
LS1: Top Overlay "+" at 463.96,399.54 h50.02; Top Overlay "-" at 421.18,689.13 h50.06
U1: Top Overlay "*" at 1651.5,341.89 h50 r180; Mechanical 13 "*" at 1547.5,356.89 h50 r180